# Altium PCB clock_led.PcbDoc (part 2 of 3)
Units mm, origin at the board's own origin, x right, y up, seen from the top; angles counter-clockwise.
Board outline 60 x 80 mm, 4 copper layers (TL, L2, L3, BL), stack 1.564 mm thick; 321 components, 72 nets, 902 pads, 698 vias.
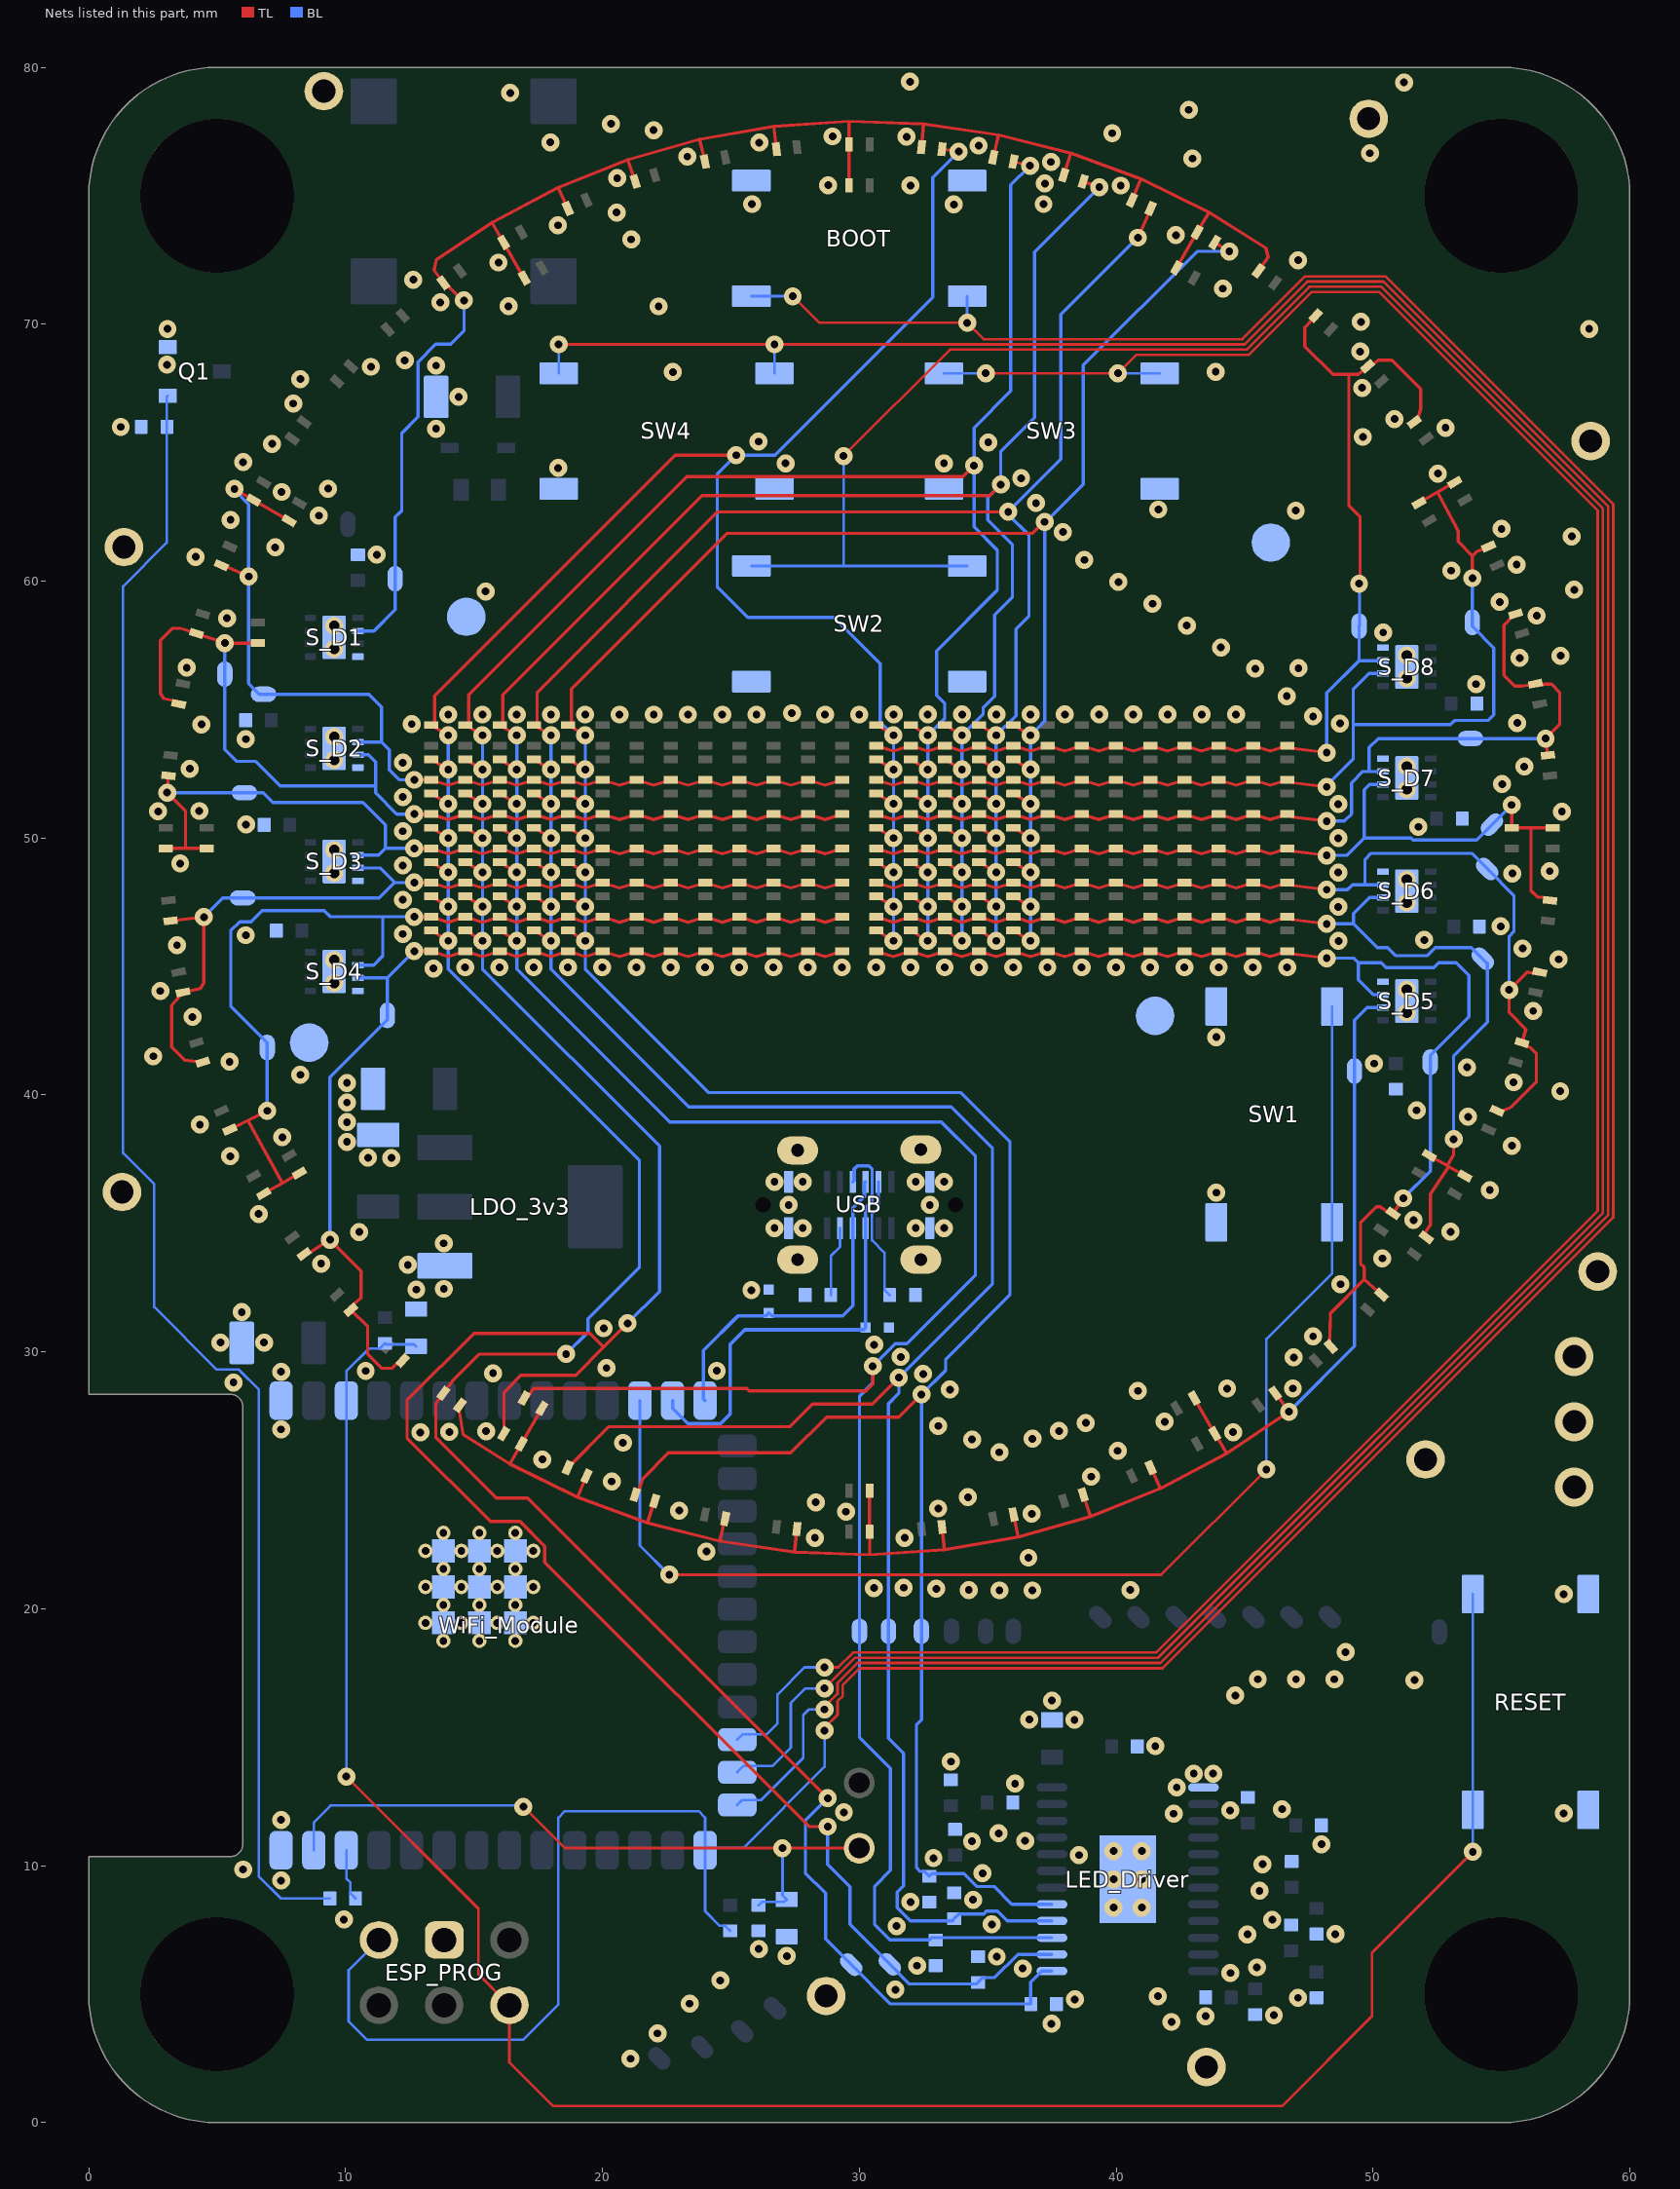
[diagram p4: the nets of this part, all layers, seen from the top]

## Via types
v1: diameter 0.7, hole 0.3, TL to BL, tented both sides, 689 vias
v2: diameter 0.7, hole 0.3, TL to BL, tented top, 6 vias
v3: diameter 1.5, hole 0.9, TL to BL, 3 vias

## Nets (pads, with @x,y where several pads share a name; then routed paths per layer and width w, separated by ;. In a path a pad name is that pad's centre, name@x,y a point inside that pad or via, vN(x,y) a via of type N, cw(c..) or ccw(c..) an arc to the next point about the centre after c; other vN are vias at no path point) (continued)
A1: D17.2 D18.2 D19.2 D20.2 D21.2 D22.2 D23.2 D24.2 D25.2 D26.2 D27.2 D28.2 D29.2 D30.2 D31.2 D32.2 pad.2@49.46,58.248 S_D8.3 | length 43.1
  TL w0.127: D17.2@30.667,53.6 31.333,53.388 ; 31.333,53.388 D18.2@32,53.6 32.667,53.388 D19.2@33.333,53.6 34,53.388 D20.2@34.667,53.6 35.333,53.388 D21.2@36,53.6 36.667,53.388 D22.2@37.333,53.6 38,53.388 D23.2@38.666,53.6 39.333,53.388 D24.2@40,53.6 40.666,53.388 D25.2@41.333,53.6 42,53.388 D26.2@42.666,53.6 43.333,53.388 D27.2@44,53.6 44.666,53.388 D28.2@45.333,53.6 46,53.388 D29.2@46.666,53.6 46.878,53.488 v1(48.2,53.325) ; D32.2@47.769,70.333 47.626,70.177 47.346,69.871 47.346,69.137 48.44,68.043 49.06,68.043 ; v1@49.5,59.9 49.5,62.5 49.06,62.94 49.06,68.043 ; D30.2@51.608,66.194 51.63,66.312 51.777,66.414 51.861,66.699 51.861,67.473 50.733,68.601 50.198,68.601 49.903,68.354 D31.2@49.797,68.364 49.64,68.223 49.439,68.043 49.06,68.043
  BL w0.127: v1(48.2,53.325) 48.2,55.647 49.46,56.907 ; v1@49.5,59.9 49.48,59.88 49.48,58.268 pad.2@49.46,58.248 49.46,56.907 ; S_D8.3@50.364,56.907 49.46,56.907
  other v1: 49.46,59.9
A2: D33.2 D34.2 D35.2 D36.2 D37.2 D38.2 D39.2 D40.2 D41.2 D42.2 D43.2 D44.2 D45.2 D46.2 D47.2 D48.2 pad.2@6.81,55.597 S_D2.2 | length 39
  TL w0.127: D46.2@5.172,60.616 5.217,60.634 v1(6.23,60.183) ; v1(5.676,63.586) 6.236,63.262 D48.2@6.417,63.154 D47.2@7.803,62.354 ; v1(12.675,52.267) D33.2@13.334,52.267 14,52.055 D34.2@14.667,52.267 15.334,52.055 D35.2@16,52.267 16.667,52.055 D36.2@17.334,52.267 18,52.055 D37.2@18.667,52.267 19.334,52.055 D38.2@20,52.267 20.667,52.055 D39.2@21.334,52.267 22,52.055 D40.2@22.667,52.267 23.334,52.055 D41.2@24,52.267 24.667,52.055 D42.2@25.333,52.267 26,52.055 D43.2@26.667,52.267 27.333,52.055 D44.2@28,52.267 28.667,52.055 D45.2@29.333,52.267
  BL w0.127: v1(5.676,63.586) 5.676,63.548 6.23,62.994 6.23,56.017 6.65,55.597 10.912,55.597 11.401,55.109 11.401,53.742 ; S_D2.2@10.507,53.742 11.401,53.742 ; v1(12.675,52.267) 12.093,52.267 11.709,52.65 11.709,53.433 11.401,53.742
A3: D49.2 D50.2 D51.2 D52.2 D53.2 D54.2 D55.2 D56.2 D57.2 D58.2 D59.2 D60.2 D61.2 D62.2 D63.2 D64.2 pad.2@53.87,58.396 S_D8.2 | length 41.5
  TL w0.127: D49.2@30.667,52.267 31.333,52.055 ; 31.333,52.055 D50.2@32,52.267 32.667,52.055 D51.2@33.333,52.267 34,52.055 D52.2@34.667,52.267 35.333,52.055 D53.2@36,52.267 36.667,52.055 D54.2@37.333,52.267 38,52.055 D55.2@38.666,52.267 39.333,52.055 D56.2@40,52.267 40.666,52.055 D57.2@41.333,52.267 42,52.055 D58.2@42.666,52.267 43.333,52.055 D59.2@44,52.267 44.666,52.055 D60.2@45.333,52.267 46,52.055 D61.2@46.666,52.267 46.878,52.155 v1(48.2,51.992) ; D63.2@51.797,63.046 52.49,63.446 D64.2@53.183,63.846 D64.2@53.37,63.944 ; 52.517,63.462 53.317,61.968 53.317,61.539 53.873,60.984 54.024,61.135 54.31,61.262 D62.2@54.503,61.347 ; v1@53.868,60.261 53.868,60.979
  BL w0.127: v1(48.2,51.992) 48.2,52.046 49.231,53.077 49.231,54.419 ; S_D8.2@50.393,56.411 49.853,56.411 49.231,55.789 49.231,54.419 ; v1(53.87,60.114) 53.87,58.239 54.707,57.403 54.707,54.803 54.482,54.578 53.176,54.578 53.017,54.419 49.231,54.419
A4: D65.2 D66.2 D67.2 D68.2 D69.2 D70.2 D71.2 D72.2 D73.2 D74.2 D75.2 D76.2 D77.2 D78.2 D79.2 D80.2 pad.2@5.301,56.378 S_D2.3 | length 38.9
  TL w0.127: D78.2@3.507,55.222 3.442,55.322 2.915,55.435 2.798,55.616 2.798,57.704 3.255,58.162 3.581,58.162 D80.2@4.198,57.963 v1(5.301,57.59) D79.2@6.589,57.59 ; v1(12.675,50.933) D65.2@13.334,50.933 14,50.722 D66.2@14.667,50.933 15.334,50.722 D67.2@16,50.933 16.667,50.722 D68.2@17.334,50.933 18,50.722 D69.2@18.667,50.933 19.334,50.722 D70.2@20,50.933 20.667,50.722 D71.2@21.334,50.933 22,50.722 D72.2@22.667,50.933 23.334,50.722 D73.2@24,50.933 24.667,50.722 D74.2@25.333,50.933 26,50.722 D75.2@26.667,50.933 27.333,50.722 D76.2@28,50.933 28.667,50.722 D77.2@29.333,50.933
  BL w0.127: v1(5.301,57.59) pad.2@5.301,56.378 5.301,53.449 5.766,52.984 6.502,52.984 7.453,52.033 11.169,52.033 ; S_D2.3@10.482,53.242 10.883,53.242 11.169,52.956 11.169,52.033 ; v1(12.675,50.933) 11.997,50.933 11.169,51.761 11.169,52.033
A5: D81.2 D82.2 D83.2 D84.2 D85.2 D86.2 D87.2 D88.2 D89.2 D90.2 D91.2 D92.2 D93.2 D94.2 D95.2 D96.2 pad.2@53.798,53.874 S_D7.3 | length 37.8
  TL w0.127: D81.2@30.667,50.933 31.333,50.722 ; 31.333,50.722 D82.2@32,50.933 32.667,50.722 D83.2@33.333,50.933 34,50.722 D84.2@34.667,50.933 35.333,50.722 D85.2@36,50.933 36.667,50.722 D86.2@37.333,50.933 38,50.722 D87.2@38.666,50.933 39.333,50.722 D88.2@40,50.933 40.666,50.722 D89.2@41.333,50.933 42,50.722 D90.2@42.666,50.933 43.333,50.722 D91.2@44,50.933 44.666,50.722 D92.2@45.333,50.933 46,50.722 D93.2@46.666,50.933 46.878,50.822 v1(48.2,50.658) ; D96.2@55.555,58.724 55.524,58.724 55.094,58.294 55.094,56.34 55.525,55.91 55.809,55.91 56.119,55.967 D95.2@56.327,56.005 56.43,55.939 56.68,55.995 56.951,55.995 57.268,55.678 57.268,54.422 v1(56.721,53.874) D94.2@56.81,53.22
  BL w0.127: v1(48.2,50.658) 48.885,50.658 49.163,50.937 49.163,52.147 49.607,52.591 49.853,52.591 ; S_D7.3@50.368,52.591 49.853,52.591 ; v1(56.721,53.874) 50.201,53.874 49.853,53.526 49.853,52.591
A6: D97.2 D98.2 D99.2 D100.2 D101.2 D102.2 D103.2 D104.2 D105.2 D106.2 D107.2 D108.2 D109.2 D110.2 D111.2 D112.2 pad.2@6.067,51.766 S_D3.2 | length 34.4
  TL w0.127: D111.2@3,49.6 3.769,49.6 ; D112.2@3.106,52.424 3.057,51.766 3.769,51.054 3.769,49.6 ; D110.2@4.6,49.6 3.769,49.6 ; v1(12.675,49.6) D97.2@13.334,49.6 14,49.388 D98.2@14.667,49.6 15.334,49.388 D99.2@16,49.6 16.667,49.388 D100.2@17.334,49.6 18,49.388 D101.2@18.667,49.6 19.334,49.388 D102.2@20,49.6 20.667,49.388 D103.2@21.334,49.6 22,49.388 D104.2@22.667,49.6 23.334,49.388 D105.2@24,49.6 24.667,49.388 D106.2@25.333,49.6 26,49.388 D107.2@26.667,49.6 27.333,49.388 D108.2@28,49.6 28.667,49.388 D109.2@29.333,49.6
  BL w0.127: v1(3.058,51.766) pad.2@6.067,51.766 6.793,51.766 7.17,51.388 10.674,51.388 11.554,50.509 11.554,49.6 ; S_D3.2@10.507,49.337 11.291,49.337 11.554,49.6 ; v1(12.675,49.6) 11.554,49.6
A7: D113.2 D114.2 D115.2 D116.2 D117.2 D118.2 D119.2 D120.2 D121.2 D122.2 D123.2 D124.2 D125.2 D126.2 D127.2 D128.2 pad.2@54.63,50.521 S_D7.2 | length 34.9
  TL w0.127: D113.2@30.667,49.6 31.333,49.388 D114.2@32,49.6 32.667,49.388 D115.2@33.333,49.6 34,49.388 D116.2@34.667,49.6 35.333,49.388 D117.2@36,49.6 36.667,49.388 D118.2@37.333,49.6 38,49.388 D119.2@38.666,49.6 39.333,49.388 D120.2@40,49.6 40.666,49.388 D121.2@41.333,49.6 42,49.388 D122.2@42.666,49.6 43.333,49.388 D123.2@44,49.6 44.666,49.388 D124.2@45.333,49.6 46,49.388 D125.2@46.666,49.6 46.878,49.489 v1(48.2,49.325) ; v1(55.4,51.291) D127.2@55.4,50.4 56.15,50.4 ; D126.2@56.894,47.576 56.823,47.665 56.416,47.709 56.15,47.963 56.15,50.4 ; D128.2@57,50.4 56.15,50.4
  BL w0.127: v1(48.2,49.325) 48.98,49.325 49.66,50.004 ; S_D7.2@50.368,52.091 49.864,52.091 49.66,51.886 49.66,50.004 ; v1(55.4,51.291) pad.2@54.63,50.521 54.031,49.922 51.557,49.922 51.474,50.004 49.66,50.004
A8: D129.2 D130.2 D131.2 D132.2 D133.2 D134.2 D135.2 D136.2 D137.2 D138.2 D139.2 D140.2 D141.2 D142.2 D143.2 D144.2 pad.2@5.995,47.667 S_D3.3 | length 36.4
  TL w0.127: D144.2@3.19,46.78 v1(4.484,46.924) 4.484,44.374 4.333,44.138 D143.2@3.673,43.995 3.55,43.855 3.23,43.491 3.23,41.864 3.742,41.352 4.215,41.301 D142.2@4.445,41.276 ; v1(12.675,48.267) D129.2@13.334,48.267 14,48.055 D130.2@14.667,48.267 15.334,48.055 D131.2@16,48.267 16.667,48.055 D132.2@17.334,48.267 18,48.055 D133.2@18.667,48.267 19.334,48.055 D134.2@20,48.267 20.667,48.055 D135.2@21.334,48.267 22,48.055 D136.2@22.667,48.267 23.334,48.055 D137.2@24,48.267 24.667,48.055 D138.2@25.333,48.267 26,48.055 D139.2@26.667,48.267 27.333,48.055 D140.2@28,48.267 28.667,48.055 D141.2@29.333,48.267
  BL w0.127: v1(4.484,46.924) 5.227,47.667 pad.2@5.969,47.667 ; pad.2@5.995,47.667 11.313,47.667 11.913,48.267 ; S_D3.3@10.482,48.837 11.343,48.837 11.913,48.267 ; v1(12.675,48.267) 11.913,48.267
A9: D145.2 D146.2 D147.2 D148.2 D149.2 D150.2 D151.2 D152.2 D153.2 D154.2 D155.2 D156.2 D157.2 D158.2 D159.2 D160.2 pad.2@54.45,48.8 S_D6.3 | length 39.6
  TL w0.127: D145.2@30.667,48.267 31.333,48.055 D146.2@32,48.267 32.667,48.055 D147.2@33.333,48.267 34,48.055 D148.2@34.667,48.267 35.333,48.055 D149.2@36,48.267 36.667,48.055 D150.2@37.333,48.267 38,48.055 D151.2@38.666,48.267 39.333,48.055 D152.2@40,48.267 40.666,48.055 D153.2@41.333,48.267 42,48.055 D154.2@42.666,48.267 43.333,48.055 D155.2@44,48.267 44.666,48.055 D156.2@45.333,48.267 46,48.055 D157.2@46.666,48.267 46.878,48.155 v1(48.2,47.992) ; D158.2@54.828,39.384 54.933,39.341 55.388,39.532 56.36,40.503 56.36,41.614 56.126,41.848 55.857,41.932 D159.2@55.802,42.037 55.954,42.558 55.301,43.211 v1(55.301,44.09) 56.003,44.792 56.396,44.713 D160.2@56.493,44.778
  BL w0.127: v1(48.2,47.992) 49.005,47.992 49.199,48.186 49.69,48.186 ; S_D6.3@50.368,48.186 49.69,48.186 ; v1(55.301,44.09) 55.301,46.166 55.487,46.352 55.487,47.763 pad.2@54.45,48.8 53.844,49.406 49.932,49.406 49.69,49.163 49.69,48.186
A10: D161.2 D162.2 D163.2 D164.2 D165.2 D166.2 D167.2 D168.2 D169.2 D170.2 D171.2 D172.2 D173.2 D174.2 D175.2 D176.2 pad.2@6.952,41.849 S_D4.2 | length 41.2
  TL w0.127: D176.2@5.497,38.653 5.686,38.748 6.207,39.009 ; D175.2@6.817,36.154 7,36.259 7.541,36.571 ; v1(6.952,39.384) 6.207,39.009 ; D174.2@8.203,36.954 8.02,36.848 7.541,36.571 ; v1(12.675,46.933) D161.2@13.334,46.933 14,46.722 D162.2@14.667,46.933 15.334,46.722 D163.2@16,46.933 16.667,46.722 D164.2@17.334,46.933 18,46.722 D165.2@18.667,46.933 19.334,46.722 D166.2@20,46.933 20.667,46.722 D167.2@21.334,46.933 22,46.722 D168.2@22.667,46.933 23.334,46.722 D169.2@24,46.933 24.667,46.722 D170.2@25.333,46.933 26,46.722 D171.2@26.667,46.933 27.333,46.722 D172.2@28,46.933 28.667,46.722 D173.2@29.333,46.933 ; 6.207,39.009 7.541,36.571
  BL w0.127: v1(6.952,39.384) 6.952,42.043 5.532,43.463 5.532,46.392 5.877,46.737 6.323,46.737 6.762,47.177 9.164,47.177 9.403,46.938 11.449,46.938 ; S_D4.2@10.512,45.059 11.093,45.059 11.449,45.415 11.449,46.938 ; v1@12.67,46.938 11.449,46.938
A11: D177.2 D178.2 D179.2 D180.2 D181.2 D182.2 D183.2 D184.2 D185.2 D186.2 D187.2 D188.2 D189.2 D190.2 D191.2 D192.2 pad.2@54.274,45.303 S_D6.2 | length 40.4
  TL w0.127: D177.2@30.667,46.933 31.333,46.722 D178.2@32,46.933 32.667,46.722 D179.2@33.333,46.933 34,46.722 D180.2@34.667,46.933 35.333,46.722 D181.2@36,46.933 36.667,46.722 D182.2@37.333,46.933 38,46.722 D183.2@38.666,46.933 39.333,46.722 D184.2@40,46.933 40.666,46.722 D185.2@41.333,46.933 42,46.722 D186.2@42.666,46.933 43.333,46.722 D187.2@44,46.933 44.666,46.722 D188.2@45.333,46.933 46,46.722 D189.2@46.666,46.933 46.878,46.822 v1(48.2,46.658) ; D190.2@52.079,34.453 52.042,34.648 52.235,34.931 52.235,36.13 52.95,37.212 ; D191.2@52.197,37.646 52.38,37.541 52.884,37.25 ; v1(53.139,38.282) 53.139,37.659 52.885,37.249 ; D192.2@53.583,36.846 52.95,37.212 ; 52.885,37.249 52.95,37.212
  BL w0.127: v1(48.2,46.658) 49.243,46.658 ; S_D6.2@50.368,47.686 49.864,47.686 49.243,47.065 49.243,46.658 ; v1(53.139,38.282) 53.139,41.525 54.452,42.838 54.452,45.126 54.444,45.126 53.835,45.735 52.433,45.735 52.122,45.424 50.88,45.424 50.57,45.735 50.167,45.735 49.243,46.658
A12: D193.2 D194.2 D195.2 D196.2 D197.2 D198.2 D199.2 D200.2 D201.2 D202.2 D203.2 D204.2 D205.2 D206.2 D207.2 D208.2 pad.2@11.629,43.097 S_D4.3 | length 39.5
  TL w0.127: D208.2@8.392,33.806 8.499,33.786 9.358,34.371 v1(9.396,34.364) 10.604,33.156 10.604,32.106 10.21,31.758 D207.2@10.203,31.636 10.862,30.977 10.862,29.912 11.408,29.366 11.827,29.366 12.129,29.667 D206.2@12.231,29.667 ; v1(12.675,45.6) D193.2@13.334,45.6 14,45.389 D194.2@14.667,45.6 15.334,45.389 D195.2@16,45.6 16.667,45.389 D196.2@17.334,45.6 18,45.389 D197.2@18.667,45.6 19.334,45.389 D198.2@20,45.6 20.667,45.389 D199.2@21.334,45.6 22,45.389 D200.2@22.667,45.6 23.334,45.389 D201.2@24,45.6 24.667,45.389 D202.2@25.333,45.6 26,45.389 D203.2@26.667,45.6 27.333,45.389 D204.2@28,45.6 28.667,45.389 D205.2@29.333,45.6
  BL w0.127: v1(9.396,34.364) 9.396,40.693 11.629,42.926 11.629,44.554 ; S_D4.3@10.507,44.554 11.629,44.554 ; v1(12.675,45.6) 11.629,44.554
A13: D209.2 D210.2 D211.2 D212.2 D213.2 D214.2 D215.2 D216.2 D217.2 D218.2 D219.2 D220.2 D221.2 D222.2 D223.2 D224.2 pad.2@52.231,41.277 S_D5.3 | length 44.6
  TL w0.127: D209.2@30.667,45.6 31.333,45.389 D210.2@32,45.6 32.667,45.389 D211.2@33.333,45.6 34,45.389 D212.2@34.667,45.6 35.333,45.389 D213.2@36,45.6 36.667,45.389 D214.2@37.333,45.6 38,45.389 D215.2@38.666,45.6 39.333,45.389 D216.2@40,45.6 40.666,45.389 D217.2@41.333,45.6 42,45.389 D218.2@42.666,45.6 43.333,45.389 D219.2@44,45.6 44.666,45.389 D220.2@45.333,45.6 46,45.389 D221.2@46.666,45.6 46.878,45.489 v1(48.2,45.325) ; D223.2@48.364,30.203 48.314,30.255 48.342,31.503 49.663,32.825 ; D224.2@50.333,32.231 50.174,32.371 49.663,32.825 ; v1(51.181,35.981) D222.2@50.784,35.394 50.671,35.374 50.289,35.643 50.13,35.643 49.516,35.029 49.516,33.439 49.663,33.291 49.663,32.825
  BL w0.127: v1(48.2,45.325) 49.258,45.325 49.436,45.147 ; S_D5.3@50.368,43.903 50.013,43.903 49.436,44.48 49.436,45.147 ; v1(51.181,35.981) 52.231,37.031 52.231,41.543 53.733,43.045 53.733,44.655 53.241,45.147 52.557,45.147 52.37,44.96 50.508,44.96 50.322,45.147 49.436,45.147
A14: D225.2 D226.2 D227.2 D228.2 D229.2 D230.2 D231.2 D232.2 D233.2 D234.2 D235.2 D236.2 D237.2 D238.2 D239.2 D240.2 pad.2@49.283,40.933 S_D5.2 | length 68.6
  TL w0.127: D225.2@14.455,27.913 14.405,27.845 14.58,26.784 16.401,25.638 ; D227.2@17.646,27.803 17.541,27.62 16.952,26.6 D226.2@16.846,26.417 16.744,26.232 16.401,25.638 ; D228.2@19.384,25.172 19.304,24.975 19.025,24.349 ; D229.2@22.037,24.198 21.962,24 21.75,23.348 ; D230.2@24.778,23.507 24.721,23.303 24.578,22.632 ; D231.2@27.576,23.106 27.554,22.896 27.483,22.214 ; D233.2@30.4,24.6 30.4,24.388 D232.2@30.4,23 30.409,22.788 30.409,22.103 ; D234.2@33.221,23.184 33.314,22.299 ; D235.2@36.005,23.673 36.048,23.466 36.19,22.795 ; D236.2@38.724,24.445 38.79,24.244 39.001,23.592 ; D237.2@41.347,25.497 41.441,25.307 41.72,24.681 ; D239.2@43.046,28.203 43.152,28.02 43.741,27 D238.2@43.846,26.817 43.958,26.638 44.301,26.044 ; D240.2@46.194,28.392 46.32,28.237 v1(46.73,27.673) 44.301,26.044 ; 16.401,25.638 19.025,24.349 ; 19.025,24.349 21.75,23.348 ; 21.75,23.348 24.578,22.632 ; 24.578,22.632 27.483,22.214 ; 27.483,22.214 30.409,22.103 ; 30.409,22.103 33.333,22.3 36.19,22.795 ; 36.19,22.795 39.001,23.592 ; 39.001,23.592 41.72,24.681 ; 41.72,24.681 44.301,26.044
  BL w0.127: v1(46.73,27.673) 49.283,30.225 pad.2@49.283,40.933 49.283,42.917 49.769,43.403 S_D5.2@50.368,43.403
A15: D241.2 D242.2 D243.2 D244.2 D245.2 D246.2 D247.2 D248.2 D249.2 D250.2 D251.2 D252.2 D253.2 D254.2 D255.2 D256.2 pad.2@11.935,60.09 S_D1.2 | length 67.5
  TL w0.127: v1(14.613,70.922) 14.554,70.922 13.868,71.608 D256.2@13.806,71.608 13.448,72.095 13.537,72.507 15.705,73.959 ; D255.2@16.954,71.797 D254.2@16.154,73.183 15.705,73.959 ; D248.2@18.653,74.503 18.278,75.318 ; D249.2@21.276,75.555 20.984,76.403 ; D250.2@23.995,76.327 23.786,77.199 ; D251.2@26.78,76.81 26.674,77.701 ; D253.2@29.6,75.4 D252.2@29.6,77 29.598,77.897 ; D241.2@32.424,76.894 32.502,77.788 ; D242.2@35.222,76.493 35.423,77.368 ; D243.2@37.963,75.802 38.238,76.656 ; D244.2@40.616,74.828 40.968,75.654 ; D246.2@42.354,72.197 43.153,73.581 D245.2@43.154,73.583 43.623,74.348 ; D247.2@45.547,72.079 45.668,72.251 45.92,72.609 45.83,72.959 43.623,74.348 ; 15.705,73.959 18.278,75.318 ; 18.278,75.318 20.984,76.403 ; 20.984,76.403 23.786,77.199 ; 23.786,77.199 26.674,77.701 ; 26.674,77.701 29.598,77.897 ; 29.598,77.897 32.502,77.788 ; 32.502,77.788 35.423,77.368 ; 35.423,77.368 38.238,76.656 ; 38.238,76.656 40.968,75.654 ; 40.968,75.654 43.623,74.348
  BL w0.127: S_D1.2@10.507,58.062 11.108,58.062 11.935,58.889 pad.2@11.935,60.09 11.935,62.493 12.188,62.746 12.188,65.762 12.819,66.392 12.819,68.53 13.515,69.226 14.096,69.226 14.613,69.744 v1(14.613,70.922)
AMBIENT: C4.1 R3.1 U1.E WiFi_Module.39 | length 26.5
  TL w0.102: v1(16.925,12.3) 18.537,10.688 U1.E@30,10.688
  BL w0.102: WiFi_Module.39@8.761,10.605 8.761,11.682 9.423,12.344 16.881,12.344 v1(16.925,12.3) ; R3.1@26.083,8.465 26.209,8.591 27.079,8.591 C4.1@27.178,8.69 27.012,8.856 27.012,10.685 v1(27.009,10.688)
BTN1: SW1.2 WiFi_Module.12 | length 51.3
  TL w0.102: v1(22.606,21.328) 41.753,21.328 v1(45.85,25.425)
  BL w0.102: WiFi_Module.12@21.461,28.105 21.461,22.462 v1@22.606,21.317 ; v1(45.85,25.425) 45.85,30.508 48.409,33.067 48.409,35.038 SW1.2@48.409,43.438
BTN2: SW2.2 WiFi_Module.25 | length 119.7
  TL w0.102: v1(28.651,16.903) 29.843,18.095 41.64,18.095 58.951,35.406 58.951,62.83 50.324,71.458 47.53,71.458 45.084,69.012 33.528,69.012 v1(29.388,64.872)
  BL w0.102: WiFi_Module.25@25.251,13.64 25.5,13.889 26.631,13.889 27.336,14.594 27.336,16.342 27.897,16.903 v1(28.651,16.903) ; SW2.2@25.8,60.59 29.388,60.59 ; v1(29.388,64.872) 29.388,60.59 ; SW2.2@34.2,60.59 29.388,60.59
BTN3: SW3.2 WiFi_Module.24 | length 101.8
  TL w0.102: v1(28.651,17.722) 29.183,17.722 29.759,18.298 41.556,18.298 58.748,35.49 58.748,62.746 50.24,71.255 47.614,71.255 45.168,68.809 40.793,68.809 v1(40.075,68.09) v1(34.925,68.09)
  BL w0.102: WiFi_Module.24@25.251,14.91 25.457,15.116 26.389,15.116 26.819,15.545 26.819,16.671 27.87,17.722 v1(28.651,17.722) ; SW3.2@33.3,68.09 v1(34.925,68.09) ; v1(40.075,68.09) SW3.2@41.7,68.09
BTN4: SW4.2 WiFi_Module.26 | length 120
  TL w0.102: v1(18.3,69.215) v1(26.7,69.215) 45,69.215 47.446,71.661 50.408,71.661 59.155,62.914 59.155,35.322 41.724,17.892 29.927,17.892 29.154,17.118 29.154,16.695 28.651,16.193 v1(28.651,16.084)
  BL w0.102: SW4.2@18.3,68.09 v1(18.3,69.215) ; WiFi_Module.26@25.251,12.37 25.439,12.558 26.183,12.558 27.819,14.194 27.819,15.865 28.038,16.084 v1(28.651,16.084) ; SW4.2@26.7,68.09 v1(26.7,69.215)
BUZ_GATE: Q1.G R4.1 R5.1 | length 64.2
  BL w0.102: Q1.G@3.075,67.211 3.036,67.172 3.036,61.494 1.34,59.798 1.34,37.735 2.55,36.525 2.55,31.752 4.99,29.312 5.846,29.312 6.627,28.531 6.627,9.579 7.478,8.728 R4.1@9.391,8.728
BUZZER: R4.2 WiFi_Module.38 | length 2
  BL w0.102: WiFi_Module.38@10.031,10.605 10.031,9.505 10.192,9.345 10.192,8.928 R4.2@10.391,8.728
CC1: R18.1 USB.A5 | length 4.8
  BL w0.102: USB.A5@30.75,36.622 30.75,35.623 30.498,35.371 30.498,34.352 30.984,33.865 30.984,32.41 R18.1@31.184,32.21
CC2: R17.1 USB.B5 | length 2.8
  BL w0.102: R17.1@28.894,32.21 28.894,33.734 29.25,34.09 USB.B5@29.25,34.822
DM: D258.K USB.A7 USB.B7 WiFi_Module.13 | length 18.8
  BL w0.108: 30.497,37.117 30.497,37.097 30.5,37.094 30.5,36.13
  BL w0.136: WiFi_Module.13@22.731,27.795 WiFi_Module.13@22.731,28.105 ; WiFi_Module.13@22.74,27.795 23.325,27.211 24.607,27.211 24.983,27.586 24.983,30.303 25.542,30.862 30.162,30.862 30.25,30.95 USB.B7@30.25,34.822 30.25,35.618 30.5,35.868 30.5,36.13 ; USB.A7@29.75,36.622 29.802,36.674 29.802,37.116 29.93,37.243 30.378,37.243 30.497,37.124 30.497,37.117
DP: D259.K USB.A6 USB.B6 WiFi_Module.14 | length 13.6
  BL w0.136: WiFi_Module.14@23.995,28.11 23.935,28.171 23.935,30.058 25.273,31.396 26.357,31.396 26.482,31.521 26.602,31.401 29.351,31.401 29.75,31.8 USB.B6@29.75,34.822 29.75,35.608 30.198,36.056 30.198,36.57 USB.A6@30.25,36.622
EN: C2.1 ESP_PROG.4 R1.2 RESET.2 WiFi_Module.3 | length 86.5
  TL w0.102: v1(10.031,13.475) 15.175,8.331 15.175,5.781 ESP_PROG.4@16.381,4.575 16.381,2.344 18.078,0.647 46.46,0.647 49.962,4.149 49.962,6.616 v1(53.887,10.541)
  BL w0.102: v1(10.031,13.475) WiFi_Module.3@10.031,28.105 10.031,29.249 10.914,30.132 11.333,30.132 R1.2@11.532,30.331 11.566,30.297 12.665,30.297 C2.1@12.744,30.218 ; v1(53.887,10.541) RESET.2@53.887,12.172 RESET.2@53.887,20.572
GND: BOOT.1 C1.1 C2.2 C3.2 C4.2 C5.1 C6.1 C7.1 C8.1 C9.1 C10.1 C11.1 C12.1 C13.1 C14.1 C15.1 C16.1 C17.1 C18.1 C19.1 C20.1 C21_D1.2 C21_D2.2 C21_D3.2 C21_D4.2 C21_D5.2 C21_D6.2 C21_D7.2 C21_D8.2 C22.2 C24.1 C25.2 D258.A D259.A ESP_PROG.2 LDO_3v3.1 LED_Driver.1 LED_Driver.25 pad.3 pad.4 pad.5 pad.6 pad.7 pad.8 pad.9 pad.10 pad.11 Q1.S R3.2 R5.2 R17.2 R18.2 R38.2 RESET.1 S_D1.4 S_D2.4 S_D3.4 S_D4.4 S_D5.4 S_D6.4 S_D7.4 S_D8.4 SW1.1 SW2.1 SW3.1 SW4.1 USB.A1 USB.A12 USB.B1 USB.B12 USB.M WiFi_Module.GND | length 0
  BL w0.3: v1(35.163,7.715) v1(35.163,7.715)
  other v1: 21.094,2.493 22.142,3.476 37.483,3.854 42.16,3.922 43.487,4.147 46.143,4.183 23.397,4.632 38.391,4.798 47.079,4.862 41.628,4.92 31.411,5.181 24.594,5.536 44.449,5.827 36.363,6.007 45.485,6.045 32.248,6.113 35.355,6.463 27.178,6.484 26.088,6.762 45.114,7.329 48.536,7.342 31.451,7.655 9.936,7.905 46.078,7.902 31.994,8.592 34.431,8.676 45.583,9.024 7.491,9.426 34.798,9.712 6.013,9.857 45.701,10.061 32.89,10.3 38.553,10.417 47.998,10.839 34.388,10.953 36.46,10.971 35.426,11.261 7.491,11.783 42.241,12.028 57.43,12.04 29.403,12.08 44.441,12.155 46.464,12.206 42.361,13.05 36.067,13.196 43.025,13.586 43.775,13.586 33.566,14.057 41.528,14.655 36.618,15.694 38.378,15.679 37.502,16.43 44.639,16.628 51.616,17.227 45.516,17.26 47.006,17.26 48.495,17.26 48.935,18.315 57.43,20.575 35.459,20.719 36.739,20.719 34.265,20.734 40.553,20.737 32.997,20.779 30.572,20.813 31.728,20.824 36.587,21.989 24.053,22.233 28.274,22.759 31.765,22.766 36.719,23.703 29.483,23.783 22.987,23.825 33.075,23.905 28.309,24.149 34.231,24.347 20.362,24.955 39.031,25.148 17.664,25.814 35.451,26.094 40.064,26.151 20.797,26.464 34.393,26.593 36.743,26.622 12.91,26.864 44.552,26.875 14.04,26.887 15.473,26.914 37.78,26.922 7.491,26.987 33.074,27.118 38.821,27.235 41.891,27.285 40.848,28.483 33.531,28.534 44.323,28.575 46.882,28.578 5.638,28.809 32.489,29.143 15.744,29.172 7.491,29.226 10.785,29.259 24.454,29.268 20.16,29.375 46.913,29.786 31.613,29.804 30.579,30.28 5.134,30.366 6.828,30.362 47.669,30.605 20.052,30.919 5.961,31.55 25.8,32.4 12.758,32.427 13.83,32.455 48.736,32.635 12.426,33.39 9.052,33.436 50.366,33.639 13.823,34.226 10.538,34.667 53.019,34.676 26.7,34.822 27.8,34.822 32.2,34.822 33.3,34.822 51.578,35.129 6.619,35.369 27.25,35.722 32.75,35.722 43.9,36.2 54.55,36.3 26.7,36.622 27.8,36.622 32.2,36.622 33.3,36.622 10.876,37.558 11.784,37.549 5.512,37.617 55.406,38.027 10.056,38.177 7.537,38.358 4.329,38.847 10.056,38.943 53.7,39.155 51.703,39.404 10.056,39.708 57.29,40.151 10.056,40.473 55.478,40.493 8.241,40.788 53.668,41.078 50.043,41.223 5.487,41.294 2.515,41.506 43.9,42.25 4.038,43.035 56.237,43.269 2.788,44.047 13.424,44.923 14.66,44.968 15.993,44.968 17.327,44.968 18.66,44.968 19.993,44.968 21.327,44.968 22.66,44.968 23.993,44.968 25.327,44.968 26.66,44.968 27.993,44.968 29.326,44.968 30.66,44.968 31.993,44.968 33.326,44.968 34.66,44.968 35.993,44.968 37.326,44.968 38.66,44.968 39.993,44.968 41.326,44.968 42.659,44.968 43.993,44.968 45.326,44.968 46.659,44.968 57.227,45.278 55.829,45.699 3.439,45.828 48.663,45.995 51.995,46.033 6.116,46.219 12.23,46.267 54.972,46.566 48.648,47.325 12.23,47.6 55.426,48.624 48.65,48.661 56.882,48.713 12.23,48.933 3.562,49.01 48.652,49.996 12.23,50.267 51.77,50.437 6.123,50.523 2.705,51.035 57.357,51.028 4.305,51.053 48.648,51.325 12.23,51.6 55.028,52.1 3.938,52.699 55.89,52.782 12.23,52.933 6.114,53.85 4.391,54.421 12.576,54.436 48.716,54.46 55.616,54.478 47.669,54.737 14,54.807 15.334,54.807 16.667,54.807 18,54.807 19.334,54.807 20.667,54.807 22,54.807 23.334,54.807 24.667,54.807 26,54.807 28.667,54.807 30,54.807 31.338,54.81 32.671,54.81 34.004,54.81 35.338,54.81 36.671,54.81 38.004,54.81 39.337,54.81 40.671,54.81 42.004,54.81 43.337,54.81 44.671,54.81 27.381,54.863 46.646,55.526 54.015,55.99 45.421,56.59 47.099,56.609 3.817,56.627 55.709,57.011 57.302,57.099 44.084,57.419 50.4,58 42.753,58.27 5.383,58.556 56.378,58.655 41.421,59.12 54.938,59.19 15.45,59.6 57.834,59.662 40.089,59.97 53.048,60.409 55.592,60.64 38.761,60.826 4.166,60.944 11.22,61.028 7.264,61.316 57.739,61.741 37.926,61.91 55.006,62.037 5.524,62.388 8.96,62.552 46.996,62.742 41.642,62.787 36.882,63.037 7.512,63.47 9.318,63.595 36.304,64.006 52.527,64.186 18.279,64.406 27.129,64.586 33.298,64.588 6.013,64.629 7.144,65.343 35.025,65.4 26.078,65.431 49.604,65.612 13.526,65.929 52.826,65.97 1.25,66 50.837,66.311 7.961,66.91 14.405,67.168 49.575,67.523 8.238,67.861 22.745,68.135 43.878,68.15 10.99,68.342 13.526,68.389 3.05,68.425 12.304,68.592 49.503,68.934 3.069,69.815 58.417,69.819 49.532,70.09 22.188,70.693 16.343,70.699 13.692,70.849 44.154,71.387 12.642,71.729 15.957,72.399 47.083,72.487 21.125,73.3 42.33,73.467 18.268,73.849 20.55,74.35 25.825,74.675 33.684,74.662 37.175,74.675 28.789,75.412 31.993,75.397 40.18,75.394 37.225,75.475 20.576,75.68 37.466,76.314 42.972,76.446 23.309,76.523 49.884,76.656 34.65,76.949 26.106,77.068 17.974,77.081 31.844,77.297 28.961,77.31 39.848,77.433 21.99,77.552 20.336,77.797 42.827,78.342 16.409,79.003 51.205,79.408 31.975,79.435
  other v2: 39.9,8.375 41,8.375 39.9,9.475 41,9.475 39.9,10.575 41,10.575
  other v3: 57.836,24.74 57.836,27.28 57.836,29.82
GPIO0: BOOT.2 ESP_PROG.1 R2.2 WiFi_Module.27 | length 145.8
  TL w0.102: v1(27.412,71.09) 28.449,70.053 v1(34.2,70.053) 34.835,69.418 44.915,69.418 47.361,71.864 50.492,71.864 59.358,62.999 59.358,35.238 41.809,17.688 30.011,17.688 29.357,17.034 29.357,16.611 29.154,16.408 29.154,15.876 28.651,15.374 v1(28.651,15.265)
  BL w0.102: ESP_PROG.1@11.301,7.115 10.125,5.939 10.125,3.942 10.842,3.225 16.901,3.225 18.284,4.608 18.284,11.868 18.543,12.126 23.749,12.126 24.001,11.874 WiFi_Module.27@24.001,10.605 24.001,8.235 24.572,7.664 24.777,7.664 R2.2@24.976,7.465 ; WiFi_Module.27@24.001,10.699 25.498,10.699 28.651,13.852 v1(28.651,15.265) ; BOOT.2@25.8,71.09 v1(27.412,71.09) ; v1@34.2,69.749 v1(34.2,70.053) BOOT.2@34.2,71.09
K0: C5.2 D1.1 D17.1 D33.1 D49.1 D65.1 D81.1 D97.1 D113.1 D129.1 D145.1 D161.1 D177.1 D193.1 D209.1 D225.1 D241.1 LED_Driver.13 pad.2@29.691,6.153 | length 142.4
  TL w0.127: D193.1@13.334,46.4 v1(14,46) ; D161.1@13.334,47.733 v1(14,47.333) ; D129.1@13.334,49.067 v1(14,48.667) ; D97.1@13.334,50.4 v1(14,50) ; D65.1@13.334,51.733 v1(14,51.333) ; D33.1@13.334,53.067 v1(14,52.667) ; D1.1@13.334,54.4 13.374,54.4 13.473,54.499 13.473,55.536 22.84,64.903 v1@25.302,64.903 ; D1.1@13.407,54.356 v1(14,54) ; v1(18.586,29.916) 15.22,29.916 14.158,28.855 D225.1@13.806,28.392 13.514,27.981 13.514,26.682 15.878,24.318 17.082,24.318 v1(28.773,12.627) ; D209.1@30.667,46.4 v1(31.333,46) ; D177.1@30.667,47.733 v1(31.333,47.333) ; D145.1@30.667,49.067 v1(31.333,48.667) ; D113.1@30.667,50.4 v1(31.333,50) ; D81.1@30.667,51.733 v1(31.333,51.333) ; D49.1@30.667,53.067 v1(31.333,52.667) ; D17.1@30.667,54.4 v1(31.333,54) ; D241.1@33.22,76.81 v1@33.874,76.721
  BL w0.127: v1(14,54) v1(14,52.667) v1(14,51.333) v1(14,50) v1(14,48.667) v1(14,47.333) v1(14,46) 14,44.899 21.441,37.458 21.441,33.295 19.437,31.291 19.437,30.768 v1(18.586,29.916) ; v1(28.773,12.627) 27.903,11.758 27.903,9.72 28.689,8.935 28.689,7.154 pad.2@29.691,6.153 31.22,4.623 C5.2@36.678,4.623 36.678,5.467 37.111,5.9 LED_Driver.13@37.5,5.9 ; v1(31.333,46) v1(31.333,47.333) v1(31.333,48.667) v1(31.333,50) v1(31.333,51.333) v1(31.333,52.667) v1(31.333,54) 30.815,54.519 30.815,56.785 29.014,58.585 25.667,58.585 24.471,59.782 24.471,64.169 v1(25.205,64.903) 26.715,64.903 32.865,71.053 32.865,75.712 v1(33.874,76.721)
K1: C6.2 D2.1 D18.1 D34.1 D50.1 D66.1 D82.1 D98.1 D114.1 D130.1 D146.1 D162.1 D178.1 D194.1 D210.1 D226.1 D242.1 LED_Driver.14 pad.2@31.191,6.166 | length 149.7
  TL w0.127: D194.1@14.667,46.4 v1(15.334,46) ; D162.1@14.667,47.733 v1(15.334,47.333) ; D130.1@14.667,49.067 v1(15.334,48.667) ; D98.1@14.667,50.4 v1(15.334,50) ; D66.1@14.667,51.733 v1(15.334,51.333) ; D34.1@14.667,53.067 v1(15.334,52.667) ; D2.1@14.667,54.4 D2.1@14.707,54.4 ; D2.1@14.741,54.356 v1(15.334,54) ; D2.1@14.767,54.4 D2.1@14.707,54.4 ; D226.1@16.154,26.817 16.17,26.834 16.17,28.435 16.83,29.095 18.96,29.095 20.052,30.187 ; v1(20.98,31.115) 20.052,30.187 ; v1(28.773,11.525) 28.039,11.525 17.756,21.808 17.756,22.439 16.795,23.4 15.646,23.4 12.395,26.651 12.395,28.116 15.002,30.724 19.515,30.724 20.052,30.187 ; D210.1@32,46.4 v1(32.667,46) ; D178.1@32,47.733 v1(32.667,47.333) ; D146.1@32,49.067 v1(32.667,48.667) ; D114.1@32,50.4 v1(32.667,50) ; D82.1@32,51.733 v1(32.667,51.333) ; D50.1@32,53.067 v1(32.667,52.667) ; D18.1@32,54.4 v1(32.667,54) v1@32.673,54.006 ; v1(34.472,64.5) 34.035,64.063 23.285,64.063 14.793,55.571 14.793,54.486 D2.1@14.707,54.4 ; D242.1@36.005,76.327 v1(36.646,76.169)
  BL w0.127: v1(15.334,54) v1(15.334,52.667) v1(15.334,51.333) v1(15.334,50) v1(15.334,48.667) v1(15.334,47.333) v1(15.334,46) 15.334,44.899 22.22,38.012 22.22,32.355 v1(20.98,31.115) ; v1(28.773,11.525) 28.773,10.047 29.633,9.187 29.633,7.723 pad.2@31.191,6.166 31.958,5.399 34.56,5.399 C6.2@34.624,5.463 ; v1(32.667,46) v1(32.667,54) ; v1@32.679,54 33.325,54.647 33.325,55.246 33.01,55.561 33.01,57.279 35.372,59.641 35.372,61.214 34.472,62.114 v1(34.472,64.5) 34.472,65.972 35.9,67.4 35.9,75.423 v1(36.646,76.169) ; C6.2@34.624,5.463 34.811,5.649 35.277,5.649 36.178,6.55 LED_Driver.14@37.5,6.55
K2: C7.2 D3.1 D19.1 D35.1 D51.1 D67.1 D83.1 D99.1 D115.1 D131.1 D147.1 D163.1 D179.1 D195.1 D211.1 D227.1 D243.1 LED_Driver.15 pad.2@30.011,19.13 | length 152.4
  TL w0.127: D195.1@16,46.4 v1(16.667,46) ; D163.1@16,47.733 v1(16.667,47.333) ; D131.1@16,49.067 v1(16.667,48.667) ; D99.1@16,50.4 v1(16.667,50) ; D67.1@16,51.733 v1(16.667,51.333) ; D35.1@16,53.067 v1(16.667,52.667) ; D3.1@16,54.4 D3.1@16.04,54.4 ; D3.1@16.074,54.356 v1(16.667,54) ; D3.1@16.1,54.4 D3.1@16.04,54.4 ; D227.1@16.954,28.203 17.09,28.233 17.309,28.575 25.623,28.575 25.708,28.489 30.261,28.489 30.526,28.755 v1(30.526,29.446) ; D211.1@33.333,46.4 v1(34,46) ; D179.1@33.333,47.733 v1(34,47.333) ; D147.1@33.333,49.067 v1(34,48.667) ; D115.1@33.333,50.4 v1(34,50) ; D83.1@33.333,51.733 v1(34,51.333) ; D51.1@33.333,53.067 v1(34,52.667) ; D19.1@33.333,54.4 v1(34,54) v1@34.005,54.005 ; v1(35.509,63.762) 35.08,63.333 23.882,63.333 16.127,55.577 16.127,54.486 D3.1@16.04,54.4 ; D243.1@38.724,75.554 v1(39.345,75.331)
  BL w0.127: v1(16.667,54) v1(16.667,52.667) v1(16.667,51.333) v1(16.667,50) v1(16.667,48.667) v1(16.667,47.333) v1(16.667,46) 16.667,44.899 22.617,38.949 33.194,38.949 34.522,37.621 34.522,32.992 31.849,30.32 31.399,30.32 v1(30.526,29.446) 30.526,28.798 30.011,28.284 pad.2@30.011,19.13 30.011,14.991 31.215,13.787 31.215,9.821 30.598,9.204 30.598,7.711 31.197,7.113 32.725,7.113 32.812,7.2 LED_Driver.15@37.5,7.2 ; v1(34,46) v1(34,47.333) v1(34,48.667) v1(34,50) v1(34,51.333) v1(34,52.667) v1(34,54) 34.822,54.822 34.822,55.066 35.268,55.511 35.268,58.683 35.964,59.378 35.964,61.41 35.001,62.372 35.001,63.254 v1(35.509,63.762) 35.509,65.048 36.83,66.368 36.83,72.816 v1(39.345,75.331)
K3: C8.2 D4.1 D20.1 D36.1 D52.1 D68.1 D84.1 D100.1 D116.1 D132.1 D148.1 D164.1 D180.1 D196.1 D212.1 D228.1 D244.1 LED_Driver.16 pad.2@31.137,19.13 | length 146.6
  TL w0.127: D196.1@17.334,46.4 v1(18,46) ; D164.1@17.334,47.733 v1(18,47.333) ; D132.1@17.334,49.067 v1(18,48.667) ; D100.1@17.334,50.4 v1(18,50) ; D68.1@17.334,51.733 v1(18,51.333) ; D36.1@17.334,53.067 v1(18,52.667) ; D4.1@17.334,54.4 D4.1@17.374,54.4 ; D4.1@17.407,54.356 v1(18,54) ; D4.1@17.434,54.4 D4.1@17.374,54.4 ; D228.1@18.66,25.497 20.254,27.091 27.306,27.091 28.187,27.972 30.513,27.972 v1(31.543,29.001) ; D212.1@34.667,46.4 v1(35.333,46) ; D180.1@34.667,47.733 v1(35.333,47.333) ; D148.1@34.667,49.067 v1(35.333,48.667) ; D116.1@34.667,50.4 v1(35.333,50) ; D84.1@34.667,51.733 v1(35.333,51.333) ; D52.1@34.667,53.067 v1(35.333,52.667) ; D20.1@34.667,54.4 v1(35.333,54) v1@35.338,54.004 ; v1(35.799,62.695) 24.481,62.695 17.46,55.674 17.46,54.486 D4.1@17.374,54.4 ; v1(40.846,73.367) 41.265,74.308 D244.1@41.347,74.503
  BL w0.127: v1(18,54) v1(18,52.667) v1(18,51.333) v1(18,50) v1(18,48.667) v1(18,47.333) v1(18,46) 18,44.899 23.369,39.53 33.575,39.53 35.187,37.918 35.187,32.645 v1(31.543,29.001) 31.543,28.386 31.137,27.98 pad.2@31.137,19.13 31.137,14.963 31.731,14.369 31.731,9.223 31.479,8.971 31.479,8.373 31.991,7.862 C8.2@33.643,7.862 ; C8.2@33.7,7.944 33.883,8.127 34.846,8.127 34.949,8.23 35.376,8.23 35.756,7.85 LED_Driver.16@37.5,7.85 ; v1(35.333,46) v1(35.333,47.333) v1(35.333,48.667) v1(35.333,50) v1(35.333,51.333) v1(35.333,52.667) v1(35.333,54) 36.097,54.764 36.097,58.13 36.608,58.641 36.608,61.783 35.799,62.592 v1(35.799,62.695) 37.854,64.75 37.854,70.376 v1(40.846,73.367)
K4: C9.2 D5.1 D21.1 D37.1 D53.1 D69.1 D85.1 D101.1 D117.1 D133.1 D149.1 D165.1 D181.1 D197.1 D213.1 D229.1 D245.1 LED_Driver.17 pad.2@32.42,19.13 | length 142
  TL w0.127: D197.1@18.667,46.4 v1(19.334,46) ; D165.1@18.667,47.733 v1(19.334,47.333) ; D133.1@18.667,49.067 v1(19.334,48.667) ; D101.1@18.667,50.4 v1(19.334,50) ; D69.1@18.667,51.733 v1(19.334,51.333) ; D37.1@18.667,53.067 v1(19.334,52.667) ; D5.1@18.667,54.4 18.707,54.4 18.793,54.486 18.793,55.796 24.856,61.859 36.75,61.859 37.196,62.305 v1@37.27,62.305 ; D5.1@18.74,54.356 v1(19.334,54) ; D229.1@21.276,24.445 21.383,24.499 21.576,25.078 22.567,26.069 27.335,26.069 28.72,27.455 31.532,27.455 v1(32.42,28.343) ; D213.1@36,46.4 v1(36.667,46) ; D181.1@36,47.733 v1(36.667,47.333) ; D149.1@36,49.067 v1(36.667,48.667) ; D117.1@36,50.4 v1(36.667,50) ; D85.1@36,51.733 v1(36.667,51.333) ; D53.1@36,53.067 v1(36.667,52.667) ; D21.1@36,54.4 v1(36.667,54) v1@36.67,54.004 ; D245.1@43.846,73.183 v1(44.408,72.835)
  BL w0.127: v1(19.334,54) v1(19.334,52.667) v1(19.334,51.333) v1(19.334,50) v1(19.334,48.667) v1(19.334,47.333) v1(19.334,46) 19.334,44.899 24.139,40.093 33.966,40.093 35.865,38.194 35.865,32.219 33.366,29.72 33.366,29.288 v1(32.42,28.343) pad.2@32.42,19.13 32.42,15.685 32.228,15.493 32.228,9.928 32.377,9.778 32.538,9.778 C9.2@32.725,9.592 32.824,9.691 34.08,9.691 34.575,9.196 35.246,9.196 35.941,8.5 LED_Driver.17@37.5,8.5 ; v1(36.667,46) v1(36.667,47.333) v1(36.667,48.667) v1(36.667,50) v1(36.667,51.333) v1(36.667,52.667) v1(36.667,54) 37.219,54.553 v1(37.219,62.305) 37.261,62.305 38.726,63.77 38.726,68.401 43.16,72.835 v1(44.408,72.835)